# EAGLE board avoccado-avr-pcb-felina-100x100 (EAGLE 7.2.0), part 1 of 3
Avoccado PCB AVR
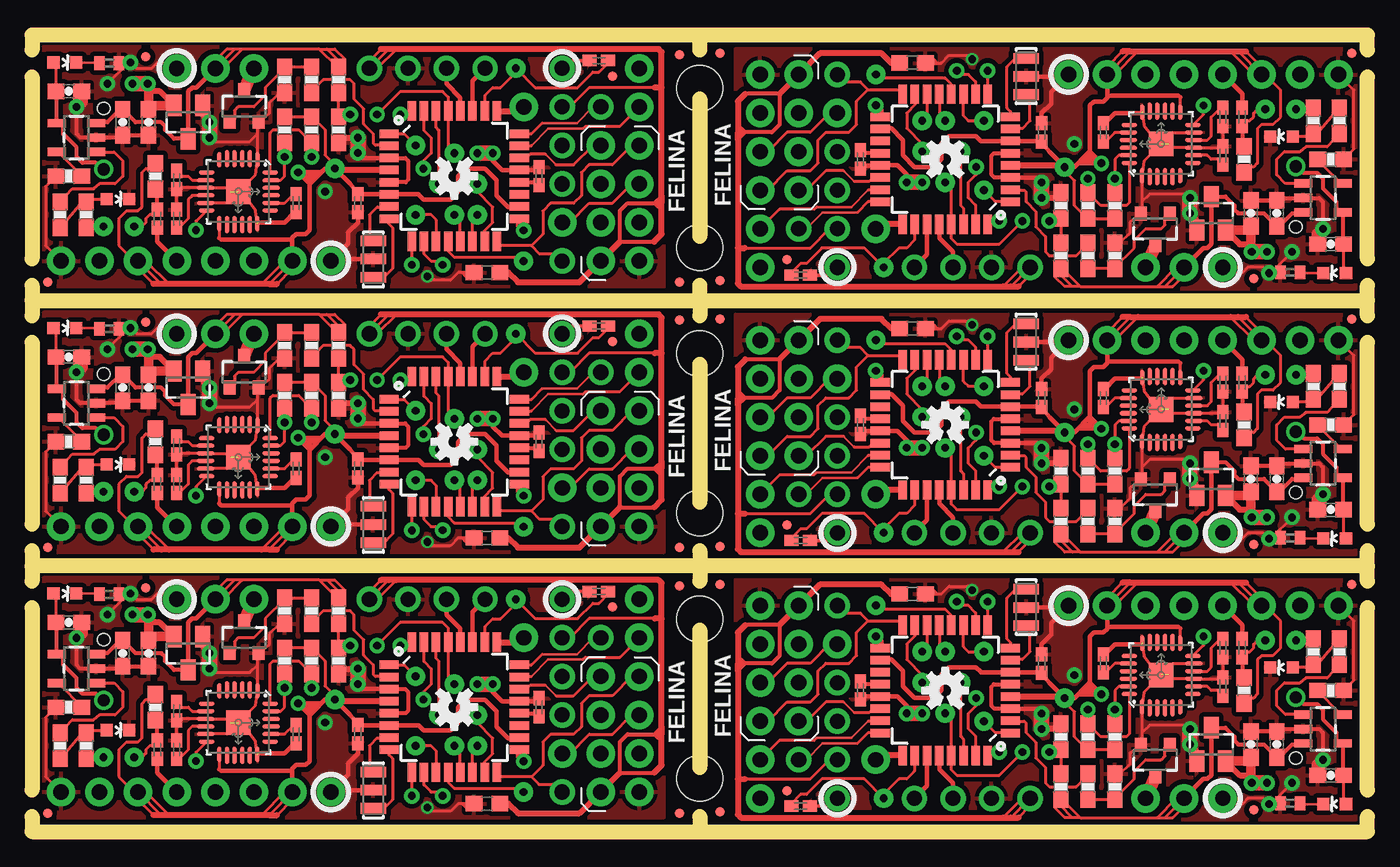
[diagram p0: board, top side]
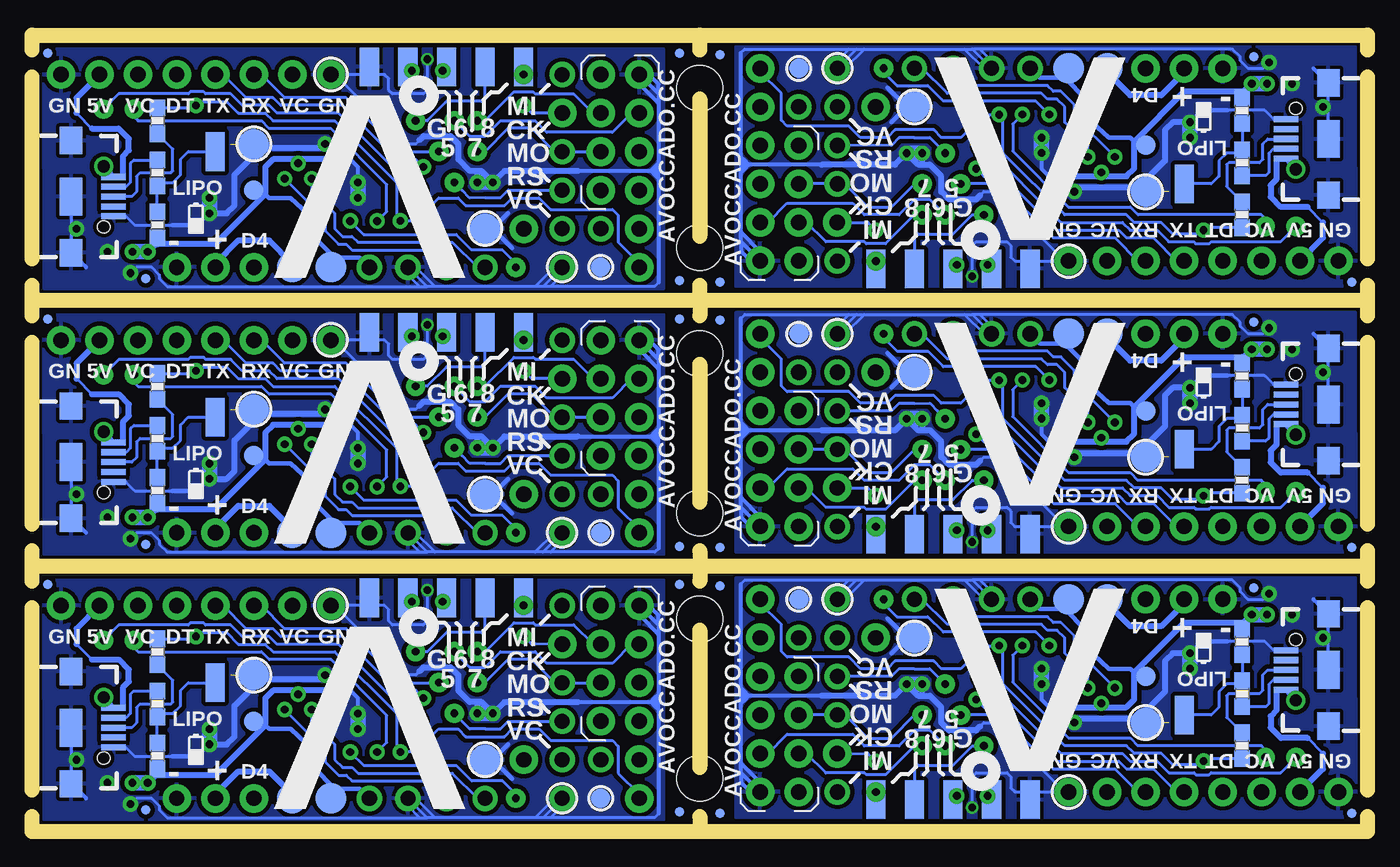
[diagram p1: board, bottom side, seen from below]

No outline drawn. Coordinates in mm, seen from the top.
Copper layers (1*16): Top 0.035mm / dielectric 1.5mm / Bottom 0.035mm
Design rules "SeeedStudio_2layer_DRU_no_angle_20140221 *": minimum track width 6mil, minimum drill 12mil, track to track 6mil, track to pad 6mil, pad to pad 6mil, via to via 6mil, smd to smd 0mil, copper to edge 10mil, drill to drill 10mil, minimum pad ring 10mil, minimum via ring 6mil, stop-mask expansion 0mil, vias tented up to drill 100mil, thermal gap 10mil
Net classes: 1 vcc: width 0.203 mm; 3 usbvcc: width 0.203 mm, drill 0.61 mm, clearance 0.152 mm
Holes 3 mm at 43.5,31 43.5,20.5 43.5,20.5 43.5,31 43.5,38 43.5,48.5 43.5,48.5 43.5,38 43.5,13.5 43.5,3 43.5,3 43.5,13.5
tRestrict: area 23.3,21.1 to 31.4,29.3; area 11.1,22.1 to 15.1,26.2; area 15.1,22.1 to 17.2,24.7; area 55.6,22.2 to 63.7,30.4; area 71.9,25.3 to 75.9,29.4; area 69.8,26.8 to 71.9,29.4; area 55.6,39.7 to 63.7,47.9; area 71.9,42.8 to 75.9,46.9; area 69.8,44.3 to 71.9,46.9; area 23.3,38.6 to 31.4,46.8; area 11.1,39.6 to 15.1,43.7; area 15.1,39.6 to 17.2,42.2; 6 more areas
Milling: 38 lines

## Footprints (pad centres in the part's own frame; a part is rotated, then mirrored left to right if it is on the bottom)
C0402K = smd 0.925 x 0.74: 1 -0.6,0; 2 0.6,0
0603-CAP = smd 1.1 x 1: 1 -0.85,0; 2 0.85,0
C0603 = smd 1.1 x 1: 1 -0.85,0; 2 0.85,0
LED-0603 = smd 0.8 x 0.8: A 0,-0.75; C 0,0.75
MICRO-FIDUCIAL = smd 0.635 x 0.635: 1 0,0
1X01NS-KIT = drill 1 pad 1.676: 1 0,0
1X02_NO_SILK = drill 1.016 pad 1.88: 1 0,0; 2 2.54,0
1X01 = drill 1.016 pad 1.88: 1 0,0
USB-B-MICRO-SMD_V03 = smd 1.6 x 0.4: D+1 2.8,0; D-1 2.8,0.65; GND1 2.8,-1.3; ID1 2.8,-0.65; VBUS1 2.8,1.3 | smd 1.5 x 1.8: SHIELD1 0,3.7; SHIELD2 0,-3.7 | smd 1.5 x 2.5: SHIELD3 0,0 | hole 0.8: 2.15,-2
SOT23 = smd 1 x 1.4: 1 -0.95,-1.1; 2 0.95,-1.1; 3 0,1.1
TQFP32-08 = smd 1.27 x 0.559: 1 -4.293,2.8; 2 -4.293,2; 3 -4.293,1.2; 4 -4.293,0.4; 5 -4.293,-0.4; 6 -4.293,-1.2; 7 -4.293,-2; 8 -4.293,-2.8; 17 4.293,-2.8; 18 4.293,-2; 19 4.293,-1.2; 20 4.293,-0.4; 21 4.293,0.4; 22 4.293,1.2; 23 4.293,2; 24 4.293,2.8 | smd 0.559 x 1.27: 9 -2.8,-4.293; 10 -2,-4.293; 11 -1.2,-4.293; 12 -0.4,-4.293; 13 0.4,-4.293; 14 1.2,-4.293; 15 2,-4.293; 16 2.8,-4.293; 25 2.8,4.293; 26 2,4.293; 27 1.2,4.293; 28 0.4,4.293; 29 -0.4,4.293; 30 -1.2,4.293; 31 -2,4.293; 32 -2.8,4.293
RESONATOR-SMD = smd 0.7 x 1.7: 1 -1.2,0; 2 0,0; 3 1.2,0
SOT23-3 = smd 0.8 x 0.9: 1 -0.95,-1; 2 0.95,-1; 3 0,1.1
0603-RES = smd 1.1 x 1: 1 -0.85,0; 2 0.85,0
R0402 = smd 0.7 x 0.9: 1 -0.65,0; 2 0.65,0
PAD.02X.02 = smd 2.54 x 1.27: P$1 0,0
PAD.03X.05 = smd 1.27 x 1.27: P$1 0,0
TP20R = smd 2 x 2: TP 0,0
QFN-24-TESTING = smd 1.016 x 0.254: 1 -2.1,1.257; 6 -2.1,-1.25; 13 2.1,-1.25; 18 2.1,1.25 | smd 1.143 x 0.254: 2 -2.163,0.75; 3 -2.163,0.25; 4 -2.163,-0.25; 5 -2.163,-0.75; 14 2.163,-0.75; 15 2.163,-0.25; 16 2.163,0.25; 17 2.163,0.75 | smd 0.254 x 1.016: 7 -1.25,-2.1; 12 1.25,-2.1; 19 1.25,2.1; 24 -1.25,2.1 | smd 0.254 x 1.143: 8 -0.75,-2.163; 9 -0.25,-2.163; 10 0.25,-2.163; 11 0.75,-2.163; 20 0.75,2.163; 21 0.25,2.163; 22 -0.25,2.163; 23 -0.75,2.163 | smd 1.626 x 1.626: P$1 0,0
SOT23-5 = smd 0.55 x 1.2: 1 -0.95,-1.3; 2 0,-1.3; 3 0.95,-1.3; 4 0.95,1.3; 5 -0.95,1.3

## Placement (x,y rotation side)
C1  0.1uF  [C0402K]  32.91,7.7 270 top
C2  0.1uF  [C0402K]  7.76,4.9 270 top
C3  0.1uF  [C0402K]  20.97,5.93 90 top
C4  4.7uF  [0603-CAP]  1.92,13.28 0 top
C5  4.7uF  [0603-CAP]  5.48,11.25 270 top
C6  4.7uF  [0603-CAP]  7.18,11.25 270 top
C7  0.1uF  [C0402K]  36.85,15.32 180 top
C8  0.1uF  [C0402K]  9.04,4.9 90 top
C9  2.2nF  [C0402K]  16.91,5.92 270 top
C10  0.1uF  [C0603]  29.48,1.35 180 top
C11  0.1uF  [C0402K]  9.04,7.44 270 top
C12  0.1uF  [C0603]  29.48,18.85 180 top
C13  0.1uF  [C0402K]  20.97,23.43 90 top
C14  0.1uF  [C0402K]  32.91,25.2 270 top
C15  4.7uF  [0603-CAP]  1.92,30.78 0 top
C16  0.1uF  [C0402K]  7.76,22.4 270 top
C17  4.7uF  [0603-CAP]  5.48,28.75 270 top
C18  4.7uF  [0603-CAP]  7.18,28.75 270 top
C19  0.1uF  [C0402K]  36.85,32.82 180 top
C20  0.1uF  [C0402K]  9.04,22.4 90 top
C21  2.2nF  [C0402K]  16.91,23.42 270 top
C22  0.1uF  [C0402K]  9.04,24.94 270 top
C23  0.1uF  [C0603]  57.52,32.65 0 top
C24  0.1uF  [C0402K]  66.03,28.07 270 top
C25  0.1uF  [C0402K]  54.09,26.3 90 top
C26  4.7uF  [0603-CAP]  85.08,20.72 180 top
C27  0.1uF  [C0402K]  79.23,29.1 90 top
C28  4.7uF  [0603-CAP]  81.52,22.75 90 top
C29  4.7uF  [0603-CAP]  79.82,22.75 90 top
C30  0.1uF  [C0402K]  50.15,18.68 0 top
C31  0.1uF  [C0402K]  77.97,29.1 270 top
C32  2.2nF  [C0402K]  70.09,28.08 90 top
C33  0.1uF  [C0402K]  77.97,26.56 90 top
C34  0.1uF  [C0603]  57.52,50.15 0 top
C35  0.1uF  [C0402K]  66.03,45.57 270 top
C36  0.1uF  [C0402K]  54.09,43.8 90 top
C37  4.7uF  [0603-CAP]  85.08,38.22 180 top
C38  0.1uF  [C0402K]  79.23,46.6 90 top
C39  4.7uF  [0603-CAP]  81.52,40.25 90 top
C40  4.7uF  [0603-CAP]  79.82,40.25 90 top
C41  0.1uF  [C0402K]  50.15,36.18 0 top
C42  0.1uF  [C0402K]  77.97,46.6 270 top
C43  2.2nF  [C0402K]  70.09,45.58 90 top
C44  0.1uF  [C0402K]  77.97,44.06 90 top
C45  0.1uF  [C0603]  29.48,36.35 180 top
C46  0.1uF  [C0402K]  20.97,40.93 90 top
C47  0.1uF  [C0402K]  32.91,42.7 270 top
C48  4.7uF  [0603-CAP]  1.92,48.28 0 top
C49  0.1uF  [C0402K]  7.76,39.9 270 top
C50  4.7uF  [0603-CAP]  5.48,46.25 270 top
C51  4.7uF  [0603-CAP]  7.18,46.25 270 top
C52  0.1uF  [C0402K]  36.85,50.32 180 top
C53  0.1uF  [C0402K]  9.04,39.9 90 top
C54  2.2nF  [C0402K]  16.91,40.92 270 top
C55  0.1uF  [C0402K]  9.04,42.44 270 top
C56  0.1uF  [C0603]  57.52,15.15 0 top
C57  0.1uF  [C0402K]  66.03,10.57 270 top
C58  0.1uF  [C0402K]  54.09,8.8 90 top
C59  4.7uF  [0603-CAP]  85.08,3.22 180 top
C60  0.1uF  [C0402K]  79.23,11.6 90 top
C61  4.7uF  [0603-CAP]  81.52,5.25 90 top
C62  4.7uF  [0603-CAP]  79.82,5.25 90 top
C63  0.1uF  [C0402K]  50.15,1.18 0 top
C64  0.1uF  [C0402K]  77.97,11.6 270 top
C65  2.2nF  [C0402K]  70.09,10.58 90 top
C66  0.1uF  [C0402K]  77.97,9.06 90 top
D1  LED  [LED-0603]  5.16,6.19 270 top
D2  LED  [LED-0603]  1.67,15.19 270 top
D3  LED  [LED-0603]  5.16,23.69 270 top
D4  LED  [LED-0603]  1.67,32.69 270 top
D5  LED  [LED-0603]  81.84,27.81 90 top
D6  LED  [LED-0603]  85.33,18.81 90 top
D7  LED  [LED-0603]  81.84,45.31 90 top
D8  LED  [LED-0603]  85.33,36.31 90 top
D9  LED  [LED-0603]  5.16,41.19 270 top
D10  LED  [LED-0603]  1.67,50.19 270 top
D11  LED  [LED-0603]  81.84,10.31 90 top
D12  LED  [LED-0603]  85.33,1.31 90 top
FID1  FIDUCIALUFIDUCIAL  [MICRO-FIDUCIAL]  42.18,0.71 180 top
FID2  FIDUCIALUFIDUCIAL  [MICRO-FIDUCIAL]  0.53,0.71 180 top
FID3  FIDUCIALUFIDUCIAL  [MICRO-FIDUCIAL]  37.74,14.3 180 top
FID4  FIDUCIALUFIDUCIAL  [MICRO-FIDUCIAL]  42.18,15.7 180 top
FID5  FIDUCIALUFIDUCIAL  [MICRO-FIDUCIAL]  7,15.57 180 top
FID6  FIDUCIALUFIDUCIAL  [MICRO-FIDUCIAL]  42.18,15.7 180 bottom
FID7  FIDUCIALUFIDUCIAL  [MICRO-FIDUCIAL]  42.18,0.71 180 bottom
FID8  FIDUCIALUFIDUCIAL  [MICRO-FIDUCIAL]  0.53,0.71 180 bottom
FID9  FIDUCIALUFIDUCIAL  [MICRO-FIDUCIAL]  7,15.57 180 bottom
FID10  FIDUCIALUFIDUCIAL  [MICRO-FIDUCIAL]  0.53,18.21 180 top
FID11  FIDUCIALUFIDUCIAL  [MICRO-FIDUCIAL]  42.18,18.21 180 top
FID12  FIDUCIALUFIDUCIAL  [MICRO-FIDUCIAL]  37.74,31.8 180 top
FID13  FIDUCIALUFIDUCIAL  [MICRO-FIDUCIAL]  42.18,33.2 180 top
FID14  FIDUCIALUFIDUCIAL  [MICRO-FIDUCIAL]  7,33.07 180 top
FID15  FIDUCIALUFIDUCIAL  [MICRO-FIDUCIAL]  42.18,33.2 180 bottom
FID16  FIDUCIALUFIDUCIAL  [MICRO-FIDUCIAL]  42.18,18.21 180 bottom
FID17  FIDUCIALUFIDUCIAL  [MICRO-FIDUCIAL]  0.53,18.21 180 bottom
FID18  FIDUCIALUFIDUCIAL  [MICRO-FIDUCIAL]  7,33.07 180 bottom
FID19  FIDUCIALUFIDUCIAL  [MICRO-FIDUCIAL]  86.47,33.29 0 top
FID20  FIDUCIALUFIDUCIAL  [MICRO-FIDUCIAL]  44.82,33.29 0 top
FID21  FIDUCIALUFIDUCIAL  [MICRO-FIDUCIAL]  49.26,19.7 0 top
FID22  FIDUCIALUFIDUCIAL  [MICRO-FIDUCIAL]  44.82,18.3 0 top
FID23  FIDUCIALUFIDUCIAL  [MICRO-FIDUCIAL]  80,18.43 0 top
FID24  FIDUCIALUFIDUCIAL  [MICRO-FIDUCIAL]  44.82,18.3 0 bottom
FID25  FIDUCIALUFIDUCIAL  [MICRO-FIDUCIAL]  44.82,33.29 0 bottom
FID26  FIDUCIALUFIDUCIAL  [MICRO-FIDUCIAL]  86.47,33.29 0 bottom
FID27  FIDUCIALUFIDUCIAL  [MICRO-FIDUCIAL]  80,18.43 0 bottom
FID28  FIDUCIALUFIDUCIAL  [MICRO-FIDUCIAL]  86.47,50.79 0 top
FID29  FIDUCIALUFIDUCIAL  [MICRO-FIDUCIAL]  44.82,50.79 0 top
FID30  FIDUCIALUFIDUCIAL  [MICRO-FIDUCIAL]  49.26,37.2 0 top
FID31  FIDUCIALUFIDUCIAL  [MICRO-FIDUCIAL]  44.82,35.8 0 top
FID32  FIDUCIALUFIDUCIAL  [MICRO-FIDUCIAL]  80,35.93 0 top
FID33  FIDUCIALUFIDUCIAL  [MICRO-FIDUCIAL]  44.82,35.8 0 bottom
FID34  FIDUCIALUFIDUCIAL  [MICRO-FIDUCIAL]  44.82,50.79 0 bottom
FID35  FIDUCIALUFIDUCIAL  [MICRO-FIDUCIAL]  86.47,50.79 0 bottom
FID36  FIDUCIALUFIDUCIAL  [MICRO-FIDUCIAL]  80,35.93 0 bottom
FID37  FIDUCIALUFIDUCIAL  [MICRO-FIDUCIAL]  0.53,35.71 180 top
FID38  FIDUCIALUFIDUCIAL  [MICRO-FIDUCIAL]  42.18,35.71 180 top
FID39  FIDUCIALUFIDUCIAL  [MICRO-FIDUCIAL]  37.74,49.3 180 top
FID40  FIDUCIALUFIDUCIAL  [MICRO-FIDUCIAL]  42.18,50.7 180 top
FID41  FIDUCIALUFIDUCIAL  [MICRO-FIDUCIAL]  7,50.57 180 top
FID42  FIDUCIALUFIDUCIAL  [MICRO-FIDUCIAL]  42.18,50.7 180 bottom
FID43  FIDUCIALUFIDUCIAL  [MICRO-FIDUCIAL]  42.18,35.71 180 bottom
FID44  FIDUCIALUFIDUCIAL  [MICRO-FIDUCIAL]  0.53,35.71 180 bottom
FID45  FIDUCIALUFIDUCIAL  [MICRO-FIDUCIAL]  7,50.57 180 bottom
FID46  FIDUCIALUFIDUCIAL  [MICRO-FIDUCIAL]  86.47,15.79 0 top
FID47  FIDUCIALUFIDUCIAL  [MICRO-FIDUCIAL]  44.82,15.79 0 top
FID48  FIDUCIALUFIDUCIAL  [MICRO-FIDUCIAL]  49.26,2.2 0 top
FID49  FIDUCIALUFIDUCIAL  [MICRO-FIDUCIAL]  44.82,0.8 0 top
FID50  FIDUCIALUFIDUCIAL  [MICRO-FIDUCIAL]  80,0.93 0 top
FID51  FIDUCIALUFIDUCIAL  [MICRO-FIDUCIAL]  44.82,0.8 0 bottom
FID52  FIDUCIALUFIDUCIAL  [MICRO-FIDUCIAL]  44.82,15.79 0 bottom
FID53  FIDUCIALUFIDUCIAL  [MICRO-FIDUCIAL]  86.47,15.79 0 bottom
FID54  FIDUCIALUFIDUCIAL  [MICRO-FIDUCIAL]  80,0.93 0 bottom
JP1  M01NOSILK-KIT  [1X01NS-KIT]  21.73,14.81 180 top
JP2  M021X02_NO_SILK  [1X02_NO_SILK]  39.52,2.11 180 top
JP3  M01PTH  [1X01]  19.2,2.11 270 top
JP4  M01NOSILK-KIT  [1X01NS-KIT]  34.44,12.27 180 top
JP5  M01NOSILK-KIT  [1X01NS-KIT]  34.44,14.81 180 top
JP6  M01PTH  [1X01]  1.42,2.11 180 top
JP7  M01PTH  [1X01]  1.42,19.61 180 top
JP8  M01PTH  [1X01]  14.12,2.11 270 top
JP9  M01PTH  [1X01]  11.57,2.11 270 top
JP10  M01PTH  [1X01]  9.04,2.11 270 top
JP11  M01PTH  [1X01]  16.66,2.11 270 top
JP12  M01NOSILK-KIT  [1X01NS-KIT]  34.44,2.11 180 top
JP13  M01PTH  [1X01]  34.44,4.65 180 top
JP14  M01NOSILK-KIT  [1X01NS-KIT]  34.44,7.19 180 top
JP15  M01NOSILK-KIT  [1X01NS-KIT]  34.44,9.73 180 top
JP16  M01NOSILK-KIT  [1X01NS-KIT]  24.27,14.81 180 top
JP17  M01PTH  [1X01]  3.96,2.11 270 top
JP18  M01PTH  [1X01]  6.5,2.11 270 top
JP19  M01PTH  [1X01]  39.52,12.27 270 top
JP20  M01NOSILK-KIT  [1X01NS-KIT]  36.98,12.27 270 top
JP21  M01PTH  [1X01]  31.89,12.27 270 top
JP22  USB_MICROB_PLUGCONN-11752  [USB-B-MICRO-SMD_V03]  2.07,10.15 180 bottom
JP23  M01PTH  [1X01]  14.12,14.81 180 top
JP24  M01PTH  [1X01]  11.57,14.81 180 top
JP25  M01PTH  [1X01]  9.04,14.81 180 top
JP26  M01PTH  [1X01]  14.12,19.61 270 top
JP27  M021X02_NO_SILK  [1X02_NO_SILK]  39.52,4.65 180 top
JP28  M021X02_NO_SILK  [1X02_NO_SILK]  39.52,7.19 180 top
JP29  M021X02_NO_SILK  [1X02_NO_SILK]  39.52,9.73 180 top
JP30  M01NOSILK-KIT  [1X01NS-KIT]  26.82,14.81 180 top
JP31  M01NOSILK-KIT  [1X01NS-KIT]  29.36,14.81 180 top
JP32  M01PTH  [1X01]  11.57,19.61 270 top
JP33  M01PTH  [1X01]  9.04,19.61 270 top
JP34  M01PTH  [1X01]  16.66,19.61 270 top
JP35  M01NOSILK-KIT  [1X01NS-KIT]  34.44,19.61 180 top
JP36  M01PTH  [1X01]  34.44,22.15 180 top
JP37  M01NOSILK-KIT  [1X01NS-KIT]  34.44,24.69 180 top
JP38  M01NOSILK-KIT  [1X01NS-KIT]  34.44,27.23 180 top
JP39  M01PTH  [1X01]  19.2,19.61 270 top
JP40  M01PTH  [1X01]  3.96,19.61 270 top
JP41  M01PTH  [1X01]  6.5,19.61 270 top
JP42  M01PTH  [1X01]  39.52,29.77 270 top
JP43  M01NOSILK-KIT  [1X01NS-KIT]  36.98,29.77 270 top
JP44  M01PTH  [1X01]  31.89,29.77 270 top
JP45  M01PTH  [1X01]  11.57,32.31 180 top
JP46  M01PTH  [1X01]  14.12,32.31 180 top
JP47  M01PTH  [1X01]  9.04,32.31 180 top
JP48  M021X02_NO_SILK  [1X02_NO_SILK]  39.52,19.61 180 top
JP49  M021X02_NO_SILK  [1X02_NO_SILK]  39.52,22.15 180 top
JP50  M021X02_NO_SILK  [1X02_NO_SILK]  39.52,24.69 180 top
JP51  M021X02_NO_SILK  [1X02_NO_SILK]  39.52,27.23 180 top
JP52  M01NOSILK-KIT  [1X01NS-KIT]  21.73,32.31 180 top
JP53  M01NOSILK-KIT  [1X01NS-KIT]  24.27,32.31 180 top
JP54  M01NOSILK-KIT  [1X01NS-KIT]  26.82,32.31 180 top
JP55  M01NOSILK-KIT  [1X01NS-KIT]  29.36,32.31 180 top
JP56  M01NOSILK-KIT  [1X01NS-KIT]  34.44,29.77 180 top
JP57  M01NOSILK-KIT  [1X01NS-KIT]  34.44,32.31 180 top
JP58  USB_MICROB_PLUGCONN-11752  [USB-B-MICRO-SMD_V03]  2.07,27.65 180 bottom
JP59  M01PTH  [1X01]  85.58,31.89 0 top
JP60  M01PTH  [1X01]  72.89,31.89 90 top
JP61  M01PTH  [1X01]  75.42,31.89 90 top
JP62  M01PTH  [1X01]  77.97,31.89 90 top
JP63  M01PTH  [1X01]  70.34,31.89 90 top
JP64  M01NOSILK-KIT  [1X01NS-KIT]  52.56,31.89 0 top
JP65  M01PTH  [1X01]  52.56,29.35 0 top
JP66  M01NOSILK-KIT  [1X01NS-KIT]  52.56,26.81 0 top
JP67  M01NOSILK-KIT  [1X01NS-KIT]  52.56,24.27 0 top
JP68  M01PTH  [1X01]  67.81,31.89 90 top
JP69  M01PTH  [1X01]  83.05,31.89 90 top
JP70  M01PTH  [1X01]  80.5,31.89 90 top
JP71  M01PTH  [1X01]  47.48,21.73 90 top
JP72  M01NOSILK-KIT  [1X01NS-KIT]  50.02,21.73 90 top
JP73  M01PTH  [1X01]  55.1,21.73 90 top
JP74  M01PTH  [1X01]  75.42,19.19 0 top
JP75  M01PTH  [1X01]  72.89,19.19 0 top
JP76  M01PTH  [1X01]  77.97,19.19 0 top
JP77  M021X02_NO_SILK  [1X02_NO_SILK]  47.48,31.89 0 top
JP78  M021X02_NO_SILK  [1X02_NO_SILK]  47.48,29.35 0 top
JP79  M021X02_NO_SILK  [1X02_NO_SILK]  47.48,26.81 0 top
JP80  M021X02_NO_SILK  [1X02_NO_SILK]  47.48,24.27 0 top
JP81  M01NOSILK-KIT  [1X01NS-KIT]  65.27,19.19 0 top
JP82  M01NOSILK-KIT  [1X01NS-KIT]  62.73,19.19 0 top
JP83  M01NOSILK-KIT  [1X01NS-KIT]  60.19,19.19 0 top
JP84  M01NOSILK-KIT  [1X01NS-KIT]  57.65,19.19 0 top
JP85  M01NOSILK-KIT  [1X01NS-KIT]  52.56,21.73 0 top
JP86  M01NOSILK-KIT  [1X01NS-KIT]  52.56,19.19 0 top
JP87  USB_MICROB_PLUGCONN-11752  [USB-B-MICRO-SMD_V03]  84.93,23.85 0 bottom
JP88  M01PTH  [1X01]  85.58,49.39 0 top
JP89  M01PTH  [1X01]  72.89,49.39 90 top
JP90  M01PTH  [1X01]  75.42,49.39 90 top
JP91  M01PTH  [1X01]  77.97,49.39 90 top
JP92  M01PTH  [1X01]  70.34,49.39 90 top
JP93  M01NOSILK-KIT  [1X01NS-KIT]  52.56,49.39 0 top
JP94  M01PTH  [1X01]  52.56,46.85 0 top
JP95  M01NOSILK-KIT  [1X01NS-KIT]  52.56,44.31 0 top
JP96  M01NOSILK-KIT  [1X01NS-KIT]  52.56,41.77 0 top
JP97  M01PTH  [1X01]  67.81,49.39 90 top
JP98  M01PTH  [1X01]  83.05,49.39 90 top
JP99  M01PTH  [1X01]  80.5,49.39 90 top
JP100  M01PTH  [1X01]  47.48,39.23 90 top
JP101  M01NOSILK-KIT  [1X01NS-KIT]  50.02,39.23 90 top
JP102  M01PTH  [1X01]  55.1,39.23 90 top
JP103  M01PTH  [1X01]  75.42,36.69 0 top
JP104  M01PTH  [1X01]  72.89,36.69 0 top
JP105  M01PTH  [1X01]  77.97,36.69 0 top
JP106  M021X02_NO_SILK  [1X02_NO_SILK]  47.48,49.39 0 top
JP107  M021X02_NO_SILK  [1X02_NO_SILK]  47.48,46.85 0 top
JP108  M021X02_NO_SILK  [1X02_NO_SILK]  47.48,44.31 0 top
JP109  M021X02_NO_SILK  [1X02_NO_SILK]  47.48,41.77 0 top
JP110  M01NOSILK-KIT  [1X01NS-KIT]  65.27,36.69 0 top
JP111  M01NOSILK-KIT  [1X01NS-KIT]  62.73,36.69 0 top
JP112  M01NOSILK-KIT  [1X01NS-KIT]  60.19,36.69 0 top
JP113  M01NOSILK-KIT  [1X01NS-KIT]  57.65,36.69 0 top
JP114  M01NOSILK-KIT  [1X01NS-KIT]  52.56,39.23 0 top
JP115  M01NOSILK-KIT  [1X01NS-KIT]  52.56,36.69 0 top
JP116  USB_MICROB_PLUGCONN-11752  [USB-B-MICRO-SMD_V03]  84.93,41.35 0 bottom
JP117  M01PTH  [1X01]  1.42,37.11 180 top
JP118  M01PTH  [1X01]  14.12,37.11 270 top
JP119  M01PTH  [1X01]  11.57,37.11 270 top
JP120  M01PTH  [1X01]  9.04,37.11 270 top
JP121  M01PTH  [1X01]  16.66,37.11 270 top
JP122  M01NOSILK-KIT  [1X01NS-KIT]  34.44,37.11 180 top
JP123  M01PTH  [1X01]  34.44,39.65 180 top
JP124  M01NOSILK-KIT  [1X01NS-KIT]  34.44,42.19 180 top
JP125  M01NOSILK-KIT  [1X01NS-KIT]  34.44,44.73 180 top
JP126  M01PTH  [1X01]  19.2,37.11 270 top
JP127  M01PTH  [1X01]  3.96,37.11 270 top
JP128  M01PTH  [1X01]  6.5,37.11 270 top
JP129  M01PTH  [1X01]  39.52,47.27 270 top
JP130  M01NOSILK-KIT  [1X01NS-KIT]  36.98,47.27 270 top
JP131  M01PTH  [1X01]  31.89,47.27 270 top
JP132  M01PTH  [1X01]  11.57,49.81 180 top
JP133  M01PTH  [1X01]  14.12,49.81 180 top
JP134  M01PTH  [1X01]  9.04,49.81 180 top
JP135  M021X02_NO_SILK  [1X02_NO_SILK]  39.52,37.11 180 top
JP136  M021X02_NO_SILK  [1X02_NO_SILK]  39.52,39.65 180 top
JP137  M021X02_NO_SILK  [1X02_NO_SILK]  39.52,42.19 180 top
JP138  M021X02_NO_SILK  [1X02_NO_SILK]  39.52,44.73 180 top
JP139  M01NOSILK-KIT  [1X01NS-KIT]  21.73,49.81 180 top
JP140  M01NOSILK-KIT  [1X01NS-KIT]  24.27,49.81 180 top
JP141  M01NOSILK-KIT  [1X01NS-KIT]  26.82,49.81 180 top
JP142  M01NOSILK-KIT  [1X01NS-KIT]  29.36,49.81 180 top
JP143  M01NOSILK-KIT  [1X01NS-KIT]  34.44,47.27 180 top
JP144  M01NOSILK-KIT  [1X01NS-KIT]  34.44,49.81 180 top
JP145  USB_MICROB_PLUGCONN-11752  [USB-B-MICRO-SMD_V03]  2.07,45.15 180 bottom
JP146  M01PTH  [1X01]  85.58,14.39 0 top
JP147  M01PTH  [1X01]  72.89,14.39 90 top
JP148  M01PTH  [1X01]  75.42,14.39 90 top
JP149  M01PTH  [1X01]  77.97,14.39 90 top
JP150  M01PTH  [1X01]  70.34,14.39 90 top
JP151  M01NOSILK-KIT  [1X01NS-KIT]  52.56,14.39 0 top
JP152  M01PTH  [1X01]  52.56,11.85 0 top
JP153  M01NOSILK-KIT  [1X01NS-KIT]  52.56,9.31 0 top
JP154  M01NOSILK-KIT  [1X01NS-KIT]  52.56,6.77 0 top
JP155  M01PTH  [1X01]  67.81,14.39 90 top
JP156  M01PTH  [1X01]  83.05,14.39 90 top
JP157  M01PTH  [1X01]  80.5,14.39 90 top
JP158  M01PTH  [1X01]  47.48,4.23 90 top
JP159  M01NOSILK-KIT  [1X01NS-KIT]  50.02,4.23 90 top
JP160  M01PTH  [1X01]  55.1,4.23 90 top
JP161  M01PTH  [1X01]  75.42,1.69 0 top
JP162  M01PTH  [1X01]  72.89,1.69 0 top
JP163  M01PTH  [1X01]  77.97,1.69 0 top
JP164  M021X02_NO_SILK  [1X02_NO_SILK]  47.48,14.39 0 top
JP165  M021X02_NO_SILK  [1X02_NO_SILK]  47.48,11.85 0 top
JP166  M021X02_NO_SILK  [1X02_NO_SILK]  47.48,9.31 0 top
JP167  M021X02_NO_SILK  [1X02_NO_SILK]  47.48,6.77 0 top
JP168  M01NOSILK-KIT  [1X01NS-KIT]  65.27,1.69 0 top
JP169  M01NOSILK-KIT  [1X01NS-KIT]  62.73,1.69 0 top
JP170  M01NOSILK-KIT  [1X01NS-KIT]  60.19,1.69 0 top
JP171  M01NOSILK-KIT  [1X01NS-KIT]  57.65,1.69 0 top
JP172  M01NOSILK-KIT  [1X01NS-KIT]  52.56,4.23 0 top
JP173  M01NOSILK-KIT  [1X01NS-KIT]  52.56,1.69 0 top
JP174  USB_MICROB_PLUGCONN-11752  [USB-B-MICRO-SMD_V03]  84.93,6.35 0 bottom
LDO  MCP1703CB  [SOT23]  9.8,11.25 180 top
LDO1  MCP1703CB  [SOT23]  9.8,28.75 180 top
LDO2  MCP1703CB  [SOT23]  77.2,22.75 0 top
LDO3  MCP1703CB  [SOT23]  77.2,40.25 0 top
LDO4  MCP1703CB  [SOT23]  9.8,46.25 180 top
LDO5  MCP1703CB  [SOT23]  77.2,5.25 0 top
LOGO1  OSHW-LOGOS  [OSHW-LOGO-S]  27.32,7.7 180 top
LOGO2  OSHW-LOGOS  [OSHW-LOGO-S]  27.32,25.2 180 top
LOGO3  OSHW-LOGOS  [OSHW-LOGO-S]  59.68,26.3 0 top
LOGO4  OSHW-LOGOS  [OSHW-LOGO-S]  59.68,43.8 0 top
LOGO5  OSHW-LOGOS  [OSHW-LOGO-S]  27.32,42.7 180 top
LOGO6  OSHW-LOGOS  [OSHW-LOGO-S]  59.68,8.8 0 top
MCU  ATMEGA328P_TQFP  [TQFP32-08]  27.32,7.7 0 top
MCU1  ATMEGA328P_TQFP  [TQFP32-08]  27.32,25.2 0 top
MCU2  ATMEGA328P_TQFP  [TQFP32-08]  59.68,26.3 180 top
MCU3  ATMEGA328P_TQFP  [TQFP32-08]  59.68,43.8 180 top
MCU4  ATMEGA328P_TQFP  [TQFP32-08]  27.32,42.7 0 top
MCU5  ATMEGA328P_TQFP  [TQFP32-08]  59.68,8.8 180 top
Q1  16MHz  [RESONATOR-SMD]  21.99,2.23 90 top
Q2  FET  [SOT23-3]  13.48,12.27 0 top
Q3  16MHz  [RESONATOR-SMD]  21.99,19.73 90 top
Q4  FET  [SOT23-3]  13.48,29.77 0 top
Q5  16MHz  [RESONATOR-SMD]  65.01,31.77 270 top
Q6  FET  [SOT23-3]  73.52,21.73 180 top
Q7  16MHz  [RESONATOR-SMD]  65.01,49.27 270 top
Q8  FET  [SOT23-3]  73.52,39.23 180 top
Q9  16MHz  [RESONATOR-SMD]  21.99,37.23 90 top
Q10  FET  [SOT23-3]  13.48,47.27 0 top
Q11  16MHz  [RESONATOR-SMD]  65.01,14.27 270 top
Q12  FET  [SOT23-3]  73.52,4.23 180 top
R1  511R  [0603-RES]  17.93,14.05 90 top
R2  10K  [0603-RES]  7.64,7.7 90 top
R3  2K  [0603-RES]  1.92,7.7 0 top
R4  2K  [0603-RES]  1.35,5.16 90 top
R5  4.7M  [0603-RES]  16.15,14.05 90 top
R6  511R  [0603-RES]  3.07,5.16 90 top
R7  4.7M  [0603-RES]  19.7,10.74 90 top
R8  4.7M  [0603-RES]  19.7,14.05 90 top
R9  2K  [R0402]  4.59,15.14 180 top
R10  10K  [0603-RES]  16.15,10.74 90 top
R11  10K  [0603-RES]  17.93,10.74 90 top
R12  10K  [0603-RES]  7.64,25.2 90 top
R13  68R  [0603-RES]  7.76,5.16 90 bottom
R14  68R  [0603-RES]  7.76,8.59 270 bottom
R15  2K  [0603-RES]  7.76,12.01 90 bottom
R16  511R  [0603-RES]  17.93,31.55 90 top
R17  2K  [0603-RES]  1.92,25.2 0 top
R18  2K  [0603-RES]  1.35,22.66 90 top
R19  4.7M  [0603-RES]  16.15,31.55 90 top
R20  511R  [0603-RES]  3.07,22.66 90 top
R21  4.7M  [0603-RES]  19.7,28.24 90 top
R22  4.7M  [0603-RES]  19.7,31.55 90 top
R23  10K  [0603-RES]  16.15,28.24 90 top
R24  10K  [0603-RES]  17.93,28.24 90 top
R25  68R  [0603-RES]  7.76,22.66 90 bottom
R26  68R  [0603-RES]  7.76,26.09 270 bottom
R27  2K  [0603-RES]  7.76,29.51 90 bottom
R28  2K  [R0402]  4.59,32.64 180 top
R29  10K  [0603-RES]  79.36,26.3 270 top
R30  511R  [0603-RES]  69.08,19.95 270 top
R31  2K  [0603-RES]  85.08,26.3 180 top
R32  2K  [0603-RES]  85.65,28.84 270 top
R33  4.7M  [0603-RES]  70.85,19.95 270 top
R34  511R  [0603-RES]  83.93,28.84 270 top
R35  4.7M  [0603-RES]  67.3,23.26 270 top
R36  4.7M  [0603-RES]  67.3,19.95 270 top
R37  10K  [0603-RES]  70.85,23.26 270 top
R38  10K  [0603-RES]  69.08,23.26 270 top
R39  68R  [0603-RES]  79.23,28.84 270 bottom
R40  68R  [0603-RES]  79.23,25.41 90 bottom
R41  2K  [0603-RES]  79.23,21.99 270 bottom
R42  2K  [R0402]  82.41,18.86 0 top
R43  10K  [0603-RES]  79.36,43.8 270 top
R44  511R  [0603-RES]  69.08,37.45 270 top
R45  2K  [0603-RES]  85.08,43.8 180 top
R46  2K  [0603-RES]  85.65,46.34 270 top
R47  4.7M  [0603-RES]  70.85,37.45 270 top
R48  511R  [0603-RES]  83.93,46.34 270 top
R49  4.7M  [0603-RES]  67.3,40.76 270 top
R50  4.7M  [0603-RES]  67.3,37.45 270 top
R51  10K  [0603-RES]  70.85,40.76 270 top
R52  10K  [0603-RES]  69.08,40.76 270 top
R53  68R  [0603-RES]  79.23,46.34 270 bottom
R54  68R  [0603-RES]  79.23,42.91 90 bottom
R55  2K  [0603-RES]  79.23,39.49 270 bottom
R56  2K  [R0402]  82.41,36.36 0 top
R57  10K  [0603-RES]  7.64,42.7 90 top
R58  511R  [0603-RES]  17.93,49.05 90 top
R59  2K  [0603-RES]  1.92,42.7 0 top
R60  2K  [0603-RES]  1.35,40.16 90 top
R61  4.7M  [0603-RES]  16.15,49.05 90 top
R62  511R  [0603-RES]  3.07,40.16 90 top
R63  4.7M  [0603-RES]  19.7,45.74 90 top
R64  4.7M  [0603-RES]  19.7,49.05 90 top
R65  10K  [0603-RES]  16.15,45.74 90 top
R66  10K  [0603-RES]  17.93,45.74 90 top
R67  68R  [0603-RES]  7.76,40.16 90 bottom
R68  68R  [0603-RES]  7.76,43.59 270 bottom
R69  2K  [0603-RES]  7.76,47.01 90 bottom
R70  2K  [R0402]  4.59,50.14 180 top
R71  10K  [0603-RES]  79.36,8.8 270 top
R72  511R  [0603-RES]  69.08,2.45 270 top
R73  2K  [0603-RES]  85.08,8.8 180 top
R74  2K  [0603-RES]  85.65,11.34 270 top
R75  4.7M  [0603-RES]  70.85,2.45 270 top
R76  511R  [0603-RES]  83.93,11.34 270 top
R77  4.7M  [0603-RES]  67.3,5.76 270 top
R78  4.7M  [0603-RES]  67.3,2.45 270 top
R79  10K  [0603-RES]  70.85,5.76 270 top
R80  10K  [0603-RES]  69.08,5.76 270 top
R81  68R  [0603-RES]  79.23,11.34 270 bottom
R82  68R  [0603-RES]  79.23,7.92 90 bottom
R83  2K  [0603-RES]  79.23,4.49 270 bottom
R84  2K  [R0402]  82.41,1.36 0 top
TP1  TEST-POINT2  [PAD.02X.02]  24.27,1.6 90 bottom
TP2  M01PTH  [1X01]  39.52,14.81 180 top
TP3  TEST-POINT3X5  [PAD.03X.05]  36.98,14.81 90 bottom
TP4  TPTP20R  [TP20R]  14.12,6.68 180 bottom
TP5  TEST-POINT3X5  [PAD.03X.05]  14.12,9.73 180 bottom
TP6  TEST-POINT2  [PAD.02X.02]  26.82,1.6 90 bottom
TP7  TEST-POINT2  [PAD.02X.02]  29.36,1.6 90 bottom
TP8  TEST-POINT2  [PAD.02X.02]  31.89,1.6 90 bottom
TP9  TEST-POINT2  [PAD.02X.02]  21.73,1.6 90 bottom
TP10  TPTP20R  [TP20R]  16.66,14.81 180 bottom
TP11  TEST-POINT2  [PAD.02X.02]  11.57,7.19 90 bottom
TP12  TPTP20R  [TP20R]  29.36,12.27 180 bottom
TP13  TPTP20R  [TP20R]  19.2,14.81 180 bottom
TP14  TEST-POINT2  [PAD.02X.02]  24.27,19.1 90 bottom
TP15  TEST-POINT2  [PAD.02X.02]  26.82,19.1 90 bottom
TP16  TEST-POINT2  [PAD.02X.02]  29.36,19.1 90 bottom
TP17  TEST-POINT2  [PAD.02X.02]  31.89,19.1 90 bottom
TP18  M01PTH  [1X01]  39.52,32.31 180 top
TP19  TEST-POINT3X5  [PAD.03X.05]  14.12,27.23 180 bottom
TP20  TEST-POINT3X5  [PAD.03X.05]  36.98,32.31 90 bottom
TP21  TEST-POINT2  [PAD.02X.02]  21.73,19.1 90 bottom
TP22  TPTP20R  [TP20R]  16.66,32.31 180 bottom
TP23  TEST-POINT2  [PAD.02X.02]  11.57,24.69 90 bottom
TP24  TPTP20R  [TP20R]  29.36,29.77 180 bottom
TP25  TPTP20R  [TP20R]  19.2,32.31 180 bottom
TP26  TPTP20R  [TP20R]  14.12,24.18 180 bottom
TP27  TEST-POINT2  [PAD.02X.02]  62.73,32.4 270 bottom
TP28  TEST-POINT2  [PAD.02X.02]  60.19,32.4 270 bottom
TP29  TEST-POINT2  [PAD.02X.02]  57.65,32.4 270 bottom
TP30  TEST-POINT2  [PAD.02X.02]  55.1,32.4 270 bottom
TP31  M01PTH  [1X01]  47.48,19.19 0 top
TP32  TEST-POINT3X5  [PAD.03X.05]  72.89,24.27 0 bottom
TP33  TEST-POINT3X5  [PAD.03X.05]  50.02,19.19 270 bottom
TP34  TEST-POINT2  [PAD.02X.02]  65.27,32.4 270 bottom
TP35  TPTP20R  [TP20R]  70.34,19.19 0 bottom
TP36  TEST-POINT2  [PAD.02X.02]  75.42,26.81 270 bottom
TP37  TPTP20R  [TP20R]  57.65,21.73 0 bottom
TP38  TPTP20R  [TP20R]  67.81,19.19 0 bottom
TP39  TPTP20R  [TP20R]  72.89,27.32 0 bottom
TP40  TEST-POINT2  [PAD.02X.02]  62.73,49.9 270 bottom
TP41  TEST-POINT2  [PAD.02X.02]  60.19,49.9 270 bottom
TP42  TEST-POINT2  [PAD.02X.02]  57.65,49.9 270 bottom
TP43  TEST-POINT2  [PAD.02X.02]  55.1,49.9 270 bottom
TP44  M01PTH  [1X01]  47.48,36.69 0 top
TP45  TEST-POINT3X5  [PAD.03X.05]  72.89,41.77 0 bottom
TP46  TEST-POINT3X5  [PAD.03X.05]  50.02,36.69 270 bottom
TP47  TEST-POINT2  [PAD.02X.02]  65.27,49.9 270 bottom
TP48  TPTP20R  [TP20R]  70.34,36.69 0 bottom
TP49  TEST-POINT2  [PAD.02X.02]  75.42,44.31 270 bottom
TP50  TPTP20R  [TP20R]  57.65,39.23 0 bottom
TP51  TPTP20R  [TP20R]  67.81,36.69 0 bottom
TP52  TPTP20R  [TP20R]  72.89,44.82 0 bottom
TP53  TEST-POINT2  [PAD.02X.02]  24.27,36.6 90 bottom
TP54  TEST-POINT2  [PAD.02X.02]  26.82,36.6 90 bottom
TP55  TEST-POINT2  [PAD.02X.02]  29.36,36.6 90 bottom
TP56  TEST-POINT2  [PAD.02X.02]  31.89,36.6 90 bottom
TP57  M01PTH  [1X01]  39.52,49.81 180 top
TP58  TEST-POINT3X5  [PAD.03X.05]  14.12,44.73 180 bottom
TP59  TEST-POINT3X5  [PAD.03X.05]  36.98,49.81 90 bottom
TP60  TEST-POINT2  [PAD.02X.02]  21.73,36.6 90 bottom
TP61  TPTP20R  [TP20R]  16.66,49.81 180 bottom
TP62  TEST-POINT2  [PAD.02X.02]  11.57,42.19 90 bottom
TP63  TPTP20R  [TP20R]  29.36,47.27 180 bottom
TP64  TPTP20R  [TP20R]  19.2,49.81 180 bottom
TP65  TPTP20R  [TP20R]  14.12,41.68 180 bottom
TP66  TEST-POINT2  [PAD.02X.02]  62.73,14.9 270 bottom
TP67  TEST-POINT2  [PAD.02X.02]  60.19,14.9 270 bottom
TP68  TEST-POINT2  [PAD.02X.02]  57.65,14.9 270 bottom
TP69  TEST-POINT2  [PAD.02X.02]  55.1,14.9 270 bottom
TP70  M01PTH  [1X01]  47.48,1.69 0 top
TP71  TEST-POINT3X5  [PAD.03X.05]  72.89,6.77 0 bottom
TP72  TEST-POINT3X5  [PAD.03X.05]  50.02,1.69 270 bottom
TP73  TEST-POINT2  [PAD.02X.02]  65.27,14.9 270 bottom
TP74  TPTP20R  [TP20R]  70.34,1.69 0 bottom
TP75  TEST-POINT2  [PAD.02X.02]  75.42,9.31 270 bottom
TP76  TPTP20R  [TP20R]  57.65,4.23 0 bottom
TP77  TPTP20R  [TP20R]  67.81,1.69 0 bottom
TP78  TPTP20R  [TP20R]  72.89,9.82 0 bottom
U1  MPU-6000QFN-24  [QFN-24-TESTING]  13.1,6.68 270 top
U2  MCP73831  [SOT23-5]  2.43,10.24 90 top
U3  MCP73831  [SOT23-5]  2.43,27.74 90 top
U4  MPU-6000QFN-24  [QFN-24-TESTING]  13.1,24.18 270 top
U5  MCP73831  [SOT23-5]  84.57,23.76 270 top
U6  MPU-6000QFN-24  [QFN-24-TESTING]  73.9,27.32 90 top
U7  MCP73831  [SOT23-5]  84.57,41.26 270 top
U8  MPU-6000QFN-24  [QFN-24-TESTING]  73.9,44.82 90 top
U9  MCP73831  [SOT23-5]  2.43,45.24 90 top
U10  MPU-6000QFN-24  [QFN-24-TESTING]  13.1,41.68 270 top
U11  MCP73831  [SOT23-5]  84.57,6.26 270 top
U12  MPU-6000QFN-24  [QFN-24-TESTING]  73.9,9.82 90 top

## Library data of the parts
C1 C3 C13 C14 C24 C25 C35 C36 C46 C47 C57 C58 = resistor
C2 C7-C12 C16 C19-C23 C27 C30-C34 C38 C41-C45 C49 C52-C56 C60 C63-C66 R9 R28 R42 R56 R70 R84 = rcl
C4-C6 C15 C17 C18 C26 C28 C29 C37 C39 C40 C48 C50 C51 C59 C61 C62 = SparkFun-Capacitors; PROD_ID: CAP-08280
D1-D12 Q1 Q3 Q5 Q7 Q9 Q11 U2 U3 U5 U7 U9 U11 = SparkFun
FID1-FID54 LOGO1-LOGO6 = SparkFun-Aesthetics
JP1-JP21 JP23-JP57 JP59-JP86 JP88-JP115 JP117-JP144 JP146-JP173 TP2 TP18 TP31 TP44 TP57 TP70 = SparkFun-Connectors
JP22 JP58 JP87 JP116 JP145 JP174 = SparkFun-Connectors; PROD_ID: CONN-11752
LDO LDO1-LDO5 = linear
MCU MCU1-MCU5 = SparkFun-DigitalIC; PROD_ID: IC-09069
Q2 Q4 Q6 Q8 Q10 Q12 = SparkFun-DiscreteSemi; PROD_ID: TRANS-08345
R1-R8 R10-R27 R29-R41 R43-R55 R57-R69 R71-R83 = SparkFun-Resistors
TP1 TP3 TP5-TP9 TP11 TP14-TP17 TP19-TP21 TP23 TP27-TP30 TP32-TP34 TP36 TP40-TP43 TP45-TP47 TP49 TP53-TP56 TP58-TP60 TP62 TP66-TP69 TP71-TP73 TP75 = SparkFun-Passives
TP4 TP10 TP12 TP13 TP22 TP24-TP26 TP35 TP37-TP39 TP48 TP50-TP52 TP61 TP63-TP65 TP74 TP76-TP78 = testpad
U1 U4 U6 U8 U10 U12 = SparkFun-Sensors

## Nets
3.3V1: C12.1 C13.2 C18.1 JP34.1 JP41.1 JP48.2 JP52.1 JP56.1 LDO1.2 MCU1.4 MCU1.6 MCU1.18 R12.2 R23.2 R24.2 R27.2 TP19.P$1 TP25.TP U4.13
3.3V2: C23.1 C24.2 C29.1 JP63.1 JP70.1 JP77.2 JP81.1 JP85.1 LDO2.2 MCU2.4 MCU2.6 MCU2.18 R29.2 R37.2 R38.2 R41.2 TP32.P$1 TP38.TP U6.13
3.3V3: C34.1 C35.2 C40.1 JP92.1 JP99.1 JP106.2 JP110.1 JP114.1 LDO3.2 MCU3.4 MCU3.6 MCU3.18 R43.2 R51.2 R52.2 R55.2 TP45.P$1 TP51.TP U8.13
3.3V4: C45.1 C46.2 C51.1 JP121.1 JP128.1 JP135.2 JP139.1 JP143.1 LDO4.2 MCU4.4 MCU4.6 MCU4.18 R57.2 R65.2 R66.2 R69.2 TP58.P$1 TP64.TP U10.13
3.3V5: C3.2 C6.1 C10.1 JP1.1 JP2.2 JP4.1 JP11.1 JP18.1 LDO.2 MCU.4 MCU.6 MCU.18 R2.2 R10.2 R11.2 R15.2 TP5.P$1 TP13.TP U1.13
3.3V6: C56.1 C57.2 C62.1 JP150.1 JP157.1 JP164.2 JP168.1 JP172.1 LDO5.2 MCU5.4 MCU5.6 MCU5.18 R71.2 R79.2 R80.2 R83.2 TP71.P$1 TP77.TP U12.13
5V1: C15.1 D4.A JP40.1 JP58.VBUS1 U3.4
5V2: C26.1 D6.A JP69.1 JP87.VBUS1 U5.4
5V3: C37.1 D8.A JP98.1 JP116.VBUS1 U7.4
5V4: C48.1 D10.A JP127.1 JP145.VBUS1 U9.4
5V5: C4.1 D2.A JP17.1 JP22.VBUS1 U2.4
5V6: C59.1 D12.A JP156.1 JP174.VBUS1 U11.4
7-TO-D-: R14.1 R15.1 TP11.P$1
7-TO-D-1: R26.1 R27.1 TP23.P$1
7-TO-D-2: R40.1 R41.1 TP36.P$1
7-TO-D-3: R54.1 R55.1 TP49.P$1
7-TO-D-4: R68.1 R69.1 TP62.P$1
7-TO-D-5: R82.1 R83.1 TP75.P$1
A6: JP30.1 MCU.28 R10.1 U1.23
A7: JP54.1 MCU1.28 R23.1 U4.23
A7-NRF-IRQ1: JP51.2 MCU1.22
A7-NRF-IRQ2: JP80.2 MCU2.22
A7-NRF-IRQ3: JP109.2 MCU3.22
A7-NRF-IRQ4: JP138.2 MCU4.22
A7-NRF-IRQ5: JP29.2 MCU.22
A7-NRF-IRQ6: JP167.2 MCU5.22
A8: JP55.1 MCU1.27 R24.1 U4.24
A9: C19.1 MCU1.26 R21.2 R22.1
A10: JP44.1 MCU1.25
A11: JP43.1 MCU1.24
A12: JP42.1 MCU1.23
A13: MCU1.19
A14: JP83.1 MCU2.28 R37.1 U6.23
A15: JP84.1 MCU2.27 R38.1 U6.24
A16: C30.1 MCU2.26 R35.2 R36.1
A17: JP73.1 MCU2.25
A18: JP72.1 MCU2.24
A19: JP71.1 MCU2.23
A20: MCU2.19
A21: JP112.1 MCU3.28 R51.1 U8.23
A22: JP113.1 MCU3.27 R52.1 U8.24
A23: C41.1 MCU3.26 R49.2 R50.1
A24: JP102.1 MCU3.25
A25: JP101.1 MCU3.24
A26: JP100.1 MCU3.23
A27: MCU3.19
A28: JP141.1 MCU4.28 R65.1 U10.23
A29: JP142.1 MCU4.27 R66.1 U10.24
A30: C52.1 MCU4.26 R63.2 R64.1
A31: JP131.1 MCU4.25
A32: JP130.1 MCU4.24
A33: JP129.1 MCU4.23
A34: MCU4.19
A35: JP31.1 MCU.27 R11.1 U1.24
A36: C7.1 MCU.26 R7.2 R8.1
A37: JP21.1 MCU.25
A38: JP20.1 MCU.24
A39: JP19.1 MCU.23
A40: MCU.19
A41: JP170.1 MCU5.28 R79.1 U12.23
A42: JP171.1 MCU5.27 R80.1 U12.24
A43: C63.1 MCU5.26 R77.2 R78.1
A44: JP160.1 MCU5.25
A45: JP159.1 MCU5.24
A46: JP158.1 MCU5.23
A47: MCU5.19
AREF1: C14.2 MCU1.20
AREF2: C25.2 MCU2.20
AREF3: C36.2 MCU3.20
AREF4: C47.2 MCU4.20
AREF5: C1.2 MCU.20
AREF6: C58.2 MCU5.20
CHG-PROG1: R17.2 U3.5
CHG-PROG2: R31.2 U5.5
CHG-PROG3: R45.2 U7.5
CHG-PROG4: R59.2 U9.5
CHG-PROG5: R3.2 U2.5
CHG-PROG6: R73.2 U11.5
D1: JP49.1 MCU1.13
D2: MCU1.12 TP17.P$1
D2-INT1: MCU1.32 R25.1 TP18.1 U4.12
D2-INT2: MCU2.32 R39.1 TP31.1 U6.12
D2-INT3: MCU3.32 R53.1 TP44.1 U8.12
D2-INT4: MCU4.32 R67.1 TP57.1 U10.12
D2-INT5: MCU.32 R13.1 TP2.1 U1.12
D2-INT6: MCU5.32 R81.1 TP70.1 U12.12
D3: JP27.1 MCU.13
D8: MCU.12 TP8.P$1
D11: MCU1.1 R20.1
D12: MCU1.2 R16.1
D13: MCU1.9 TP14.P$1
D14: MCU1.10 TP15.P$1
D15: MCU1.11 TP16.P$1
D16: JP49.2 MCU1.14
D17: JP78.1 MCU2.13
D18: MCU2.12 TP30.P$1
D19: MCU2.1 R34.1
D20: MCU2.2 R30.1
D21: MCU2.9 TP27.P$1
D22: MCU2.10 TP28.P$1
D23: MCU2.11 TP29.P$1
D24: JP78.2 MCU2.14
D25: JP107.1 MCU3.13
D26: MCU3.12 TP43.P$1
D27: MCU3.1 R48.1
D28: MCU3.2 R44.1
D29: MCU3.9 TP40.P$1
D30: MCU3.10 TP41.P$1
D31: MCU3.11 TP42.P$1
D32: JP107.2 MCU3.14
D33: JP136.1 MCU4.13
D34: MCU4.12 TP56.P$1
D35: MCU4.1 R62.1
D36: MCU4.2 R58.1
D37: MCU4.9 TP53.P$1
D38: MCU4.10 TP54.P$1
D39: MCU4.11 TP55.P$1
D40: JP136.2 MCU4.14
D41: MCU.1 R6.1
D42: MCU.2 R1.1
D43: MCU.9 TP1.P$1
D44: MCU.10 TP6.P$1
D45: MCU.11 TP7.P$1
D46: JP27.2 MCU.14
D47: JP165.1 MCU5.13
D48: MCU5.12 TP69.P$1
D49: MCU5.1 R76.1
D50: MCU5.2 R72.1
D51: MCU5.9 TP66.P$1
D52: MCU5.10 TP67.P$1
D53: MCU5.11 TP68.P$1
D54: JP165.2 MCU5.14
DTR1: C16.2 JP33.1
DTR2: C27.2 JP62.1
DTR3: C38.2 JP91.1
DTR4: C49.2 JP120.1
DTR5: C2.2 JP10.1
DTR6: C60.2 JP149.1
GND [vcc]: C1.1 C3.1 C4.2 C5.2 C6.2 C7.2 C8.2 C9.2 C10.2 C11.2 D1.C JP2.1 JP3.1 JP5.1 JP6.1 JP16.1 JP22.GND1 JP22.SHIELD1 JP22.SHIELD2 JP22.SHIELD3 JP25.1 LDO.1 MCU.3 MCU.5 MCU.21 Q1.2 Q2.2 R3.1 R5.1 R7.1 R9.1 TP3.P$1 TP4.TP TP9.P$1 TP12.TP U1.1 U1.9 U1.11 U1.18 U2.2
GND1 [vcc]: C12.2 C13.1 C14.1 C15.2 C17.2 C18.2 C19.2 C20.2 C21.2 C22.2 D3.C JP7.1 JP39.1 JP47.1 JP48.1 JP53.1 JP57.1 JP58.GND1 JP58.SHIELD1 JP58.SHIELD2 JP58.SHIELD3 LDO1.1 MCU1.3 MCU1.5 MCU1.21 Q3.2 Q4.2 R17.1 R19.1 R21.1 R28.1 TP20.P$1 TP21.P$1 TP24.TP TP26.TP U3.2 U4.1 U4.9 U4.11 U4.18
GND2 [vcc]: C23.2 C24.1 C25.1 C26.2 C28.2 C29.2 C30.2 C31.2 C32.2 C33.2 D5.C JP59.1 JP68.1 JP76.1 JP77.1 JP82.1 JP86.1 JP87.GND1 JP87.SHIELD1 JP87.SHIELD2 JP87.SHIELD3 LDO2.1 MCU2.3 MCU2.5 MCU2.21 Q5.2 Q6.2 R31.1 R33.1 R35.1 R42.1 TP33.P$1 TP34.P$1 TP37.TP TP39.TP U5.2 U6.1 U6.9 U6.11 U6.18
GND3 [vcc]: C34.2 C35.1 C36.1 C37.2 C39.2 C40.2 C41.2 C42.2 C43.2 C44.2 D7.C JP88.1 JP97.1 JP105.1 JP106.1 JP111.1 JP115.1 JP116.GND1 JP116.SHIELD1 JP116.SHIELD2 JP116.SHIELD3 LDO3.1 MCU3.3 MCU3.5 MCU3.21 Q7.2 Q8.2 R45.1 R47.1 R49.1 R56.1 TP46.P$1 TP47.P$1 TP50.TP TP52.TP U7.2 U8.1 U8.9 U8.11 U8.18
GND4 [vcc]: C45.2 C46.1 C47.1 C48.2 C50.2 C51.2 C52.2 C53.2 C54.2 C55.2 D9.C JP117.1 JP126.1 JP134.1 JP135.1 JP140.1 JP144.1 JP145.GND1 JP145.SHIELD1 JP145.SHIELD2 JP145.SHIELD3 LDO4.1 MCU4.3 MCU4.5 MCU4.21 Q9.2 Q10.2 R59.1 R61.1 R63.1 R70.1 TP59.P$1 TP60.P$1 TP63.TP TP65.TP U9.2 U10.1 U10.9 U10.11 U10.18
GND5 [vcc]: C56.2 C57.1 C58.1 C59.2 C61.2 C62.2 C63.2 C64.2 C65.2 C66.2 D11.C JP146.1 JP155.1 JP163.1 JP164.1 JP169.1 JP173.1 JP174.GND1 JP174.SHIELD1 JP174.SHIELD2 JP174.SHIELD3 LDO5.1 MCU5.3 MCU5.5 MCU5.21 Q11.2 Q12.2 R73.1 R75.1 R77.1 R84.1 TP72.P$1 TP73.P$1 TP76.TP TP78.TP U11.2 U12.1 U12.9 U12.11 U12.18
LED1: D3.A R18.1 R20.2
LED2: D5.A R32.1 R34.2
LED3: D7.A R46.1 R48.2
LED4: D9.A R60.1 R62.2
LED5: D1.A R4.1 R6.2
LED6: D11.A R74.1 R76.2
MISO1: JP35.1 JP51.1 MCU1.16
MISO2: JP64.1 JP80.1 MCU2.16
MISO3: JP93.1 JP109.1 MCU3.16
MISO4: JP122.1 JP138.1 MCU4.16
MISO5: JP12.1 JP29.1 MCU.16
MISO6: JP151.1 JP167.1 MCU5.16
MOSI1: JP37.1 JP50.2 MCU1.15
MOSI2: JP66.1 JP79.2 MCU2.15
MOSI3: JP95.1 JP108.2 MCU3.15
MOSI4: JP124.1 JP137.2 MCU4.15
MOSI5: JP14.1 JP28.2 MCU.15
MOSI6: JP153.1 JP166.2 MCU5.15
N$2: MCU.8 Q1.1
N$4: MCU.7 Q1.3
N$5: Q2.1 R1.2 R5.2
N$9: MCU1.8 Q3.1
N$11: MCU1.7 Q3.3
N$12: Q4.1 R16.2 R19.2
N$13: C20.1 U4.10
N$14: C21.1 U4.20
N$15: C22.1 U4.8
N$16: JP58.D+1 R25.2
N$17: JP58.D-1 R26.2
N$18: D4.C R28.2
N$19: MCU2.8 Q5.1
N$20: MCU2.7 Q5.3
N$21: Q6.1 R30.2 R33.2
N$22: C31.1 U6.10
N$23: C32.1 U6.20
N$24: C33.1 U6.8
N$25: JP87.D+1 R39.2
N$26: JP87.D-1 R40.2
N$27: D6.C R42.2
N$28: MCU3.8 Q7.1
N$29: MCU3.7 Q7.3
N$30: Q8.1 R44.2 R47.2
N$31: C42.1 U8.10
N$32: C43.1 U8.20
N$33: C44.1 U8.8
N$34: JP116.D+1 R53.2
N$35: JP116.D-1 R54.2
N$36: D8.C R56.2
N$37: MCU4.8 Q9.1
N$38: MCU4.7 Q9.3
N$39: Q10.1 R58.2 R61.2
N$40: C53.1 U10.10
N$41: C54.1 U10.20
N$42: C55.1 U10.8
N$43: JP145.D+1 R67.2
N$44: JP145.D-1 R68.2
N$45: D10.C R70.2
N$46: C8.1 U1.10
N$47: C9.1 U1.20
N$48: C11.1 U1.8
N$49: JP22.D+1 R13.2
N$50: JP22.D-1 R14.2
N$51: D2.C R9.2
N$52: MCU5.8 Q11.1
N$53: MCU5.7 Q11.3
N$54: Q12.1 R72.2 R75.2
N$55: C64.1 U12.10
N$56: C65.1 U12.20
N$57: C66.1 U12.8
N$58: JP174.D+1 R81.2
N$59: JP174.D-1 R82.2
N$60: D12.C R84.2
RESET1: C16.1 JP38.1 MCU1.29 R12.1
RESET2: C27.1 JP67.1 MCU2.29 R29.1
RESET3: C38.1 JP96.1 MCU3.29 R43.1
RESET4: C49.1 JP125.1 MCU4.29 R57.1
RESET5: C2.1 JP15.1 MCU.29 R2.1
RESET6: C60.1 JP154.1 MCU5.29 R71.1
RXI1: JP26.1 MCU1.30
RXI2: JP60.1 MCU2.30
RXI3: JP89.1 MCU3.30
RXI4: JP118.1 MCU4.30
RXI5: JP8.1 MCU.30
RXI6: JP147.1 MCU5.30
SCK1: JP36.1 JP50.1 MCU1.17
SCK2: JP65.1 JP79.1 MCU2.17
SCK3: JP94.1 JP108.1 MCU3.17
SCK4: JP123.1 JP137.1 MCU4.17
SCK5: JP13.1 JP28.1 MCU.17
SCK6: JP152.1 JP166.1 MCU5.17
SOC: R4.2 U2.1
SOC1: R18.2 U3.1
SOC2: R32.2 U5.1
SOC3: R46.2 U7.1
SOC4: R60.2 U9.1
SOC5: R74.2 U11.1
TXO1: JP32.1 MCU1.31
TXO2: JP61.1 MCU2.31
TXO3: JP90.1 MCU3.31
TXO4: JP119.1 MCU4.31
TXO5: JP9.1 MCU.31
TXO6: JP148.1 MCU5.31
VBAT1 [vcc]: C17.1 JP45.1 LDO1.3 R22.2 TP22.TP U3.3
VBAT2 [vcc]: C28.1 JP74.1 LDO2.3 R36.2 TP35.TP U5.3
VBAT3 [vcc]: C39.1 JP103.1 LDO3.3 R50.2 TP48.TP U7.3
VBAT4 [vcc]: C50.1 JP132.1 LDO4.3 R64.2 TP61.TP U9.3
VBAT5 [vcc]: C5.1 JP24.1 LDO.3 R8.2 TP10.TP U2.3
VBAT6 [vcc]: C61.1 JP161.1 LDO5.3 R78.2 TP74.TP U11.3
VIBR1: JP46.1 Q4.3
VIBR2: JP75.1 Q6.3
VIBR3: JP104.1 Q8.3
VIBR4: JP133.1 Q10.3
VIBR5: JP23.1 Q2.3
VIBR6: JP162.1 Q12.3

## Tracks (layer width: path | path; a pad name or v marks a point on that pad's centre or on a via)
3.3V1  (via drill 0.51 pad 1.02, 0.51 pad 1.27)
  Top 0.203: 31.58,23.16 31.62,23.19 MCU1.18 | R23.2 R24.2 17.96,29.09 18.81,28.24 18.81,26.59 19.45,25.96 v19.45,25.7 | U4.13 11.85,21.11 | 24.97,23.99 24.96,24 | 23.03,25.59 MCU1.4 | 23,33.58 JP52.1 | 40.53,31.04 36.21,31.04 34.94,29.77 JP56.1 | 40.91,31.04 40.99,31.04 | 22.5,33.58 21.73,32.82 JP52.1 | 23.51,33.58 22.24,32.31 JP52.1 | JP34.1 15.13,18.08 | 16.15,19.61 14.62,18.08 | 15.64,18.08 16.66,19.1 | 8.02,18.08 JP41.1 | 7.51,18.08 6.5,19.1 JP41.1 | JP41.1 7,19.61 8.53,18.08 | 7.76,25.7 R12.2 7.17,25.7 7,25.7 6.75,25.45 6.75,23.16 6.5,22.91 5.73,22.91 5.22,22.4 5.22,20.62 6.24,19.61 JP41.1
  Top 0.254: 31.65,23.16 31.62,23.19 | 38.24,20.87 38.24,20.88 | 38.24,20.88 40.49,20.88 | 38.24,20.88 38.24,22.91 38.75,23.42 40.53,23.42 | MCU1.6 22.96,23.93 | 16.15,19.61 JP34.1 16.66,19.1 | 40.53,23.42 41.04,23.93 41.04,23.42 40.53,23.42 | 40.53,23.42 41.04,22.91
  Top 0.305: 31.58,23.16 30.88,23.16 30.12,23.92 30.12,24.93 29.36,25.7 28.09,25.7 27.58,25.19 27.58,24.17 27.07,23.66 25.29,23.66 24.97,23.99 24.97,24 | 24.96,24 MCU1.6 21,24 C13.2 20.46,24.69 v19.45,25.7 18.81,25.7 | 23.03,25.59 23.04,25.58 | 16.4,19.61 JP34.1 16.66,21 | 16.66,21 16.66,21.13 16.91,21.39 17.54,21.39 17.8,21.64 17.8,24.66 18.81,25.7 | 16.66,21 11.96,21 11.85,21.11 | v17.04,25.45 18.56,25.45 | 18.56,25.45 18.81,25.7 | 18.56,25.45 18.31,25.2 17.16,25.2 17.04,25.32 v17.04,25.45 | v17.04,25.45 17.8,24.69 17.8,25.07
  Top 0.381: JP48.2 38.24,20.87
  Top 0.406: 40.49,20.88 40.99,21.38 40.99,31.04 40.99,33.38 40.78,33.58 23.51,33.58 23,33.58 22.5,33.58 | v7.13,31.29 7.13,30.78 7.92,30.78 LDO1.2 | 23.04,25.58 19.58,25.58 v19.45,25.7 | 40.91,31.04 40.53,31.04 | C12.1 30.88,18.85 31.51,18.21 35.58,18.21 JP48.2 | 15.64,18.08 15.13,18.08 14.62,18.08 8.53,18.08 8.02,18.08 7.51,18.08
  Top 0.61: C18.1 7.18,30.74 v7.13,31.29 | LDO1.2 7.58,29.85 7.41,29.68
  Top 1.016: v7.13,31.29 v6.11,31.29
  Bottom 0.152: 16.91,25.2 16.91,25.32 v17.04,25.45
  Bottom 0.254: R27.2 7.76,30.78
  Bottom 0.305: JP52.1 21.1,31.67 19.45,31.67 | 19.45,31.67 18.05,30.28 18.05,29.13 16.53,27.74 15.13,27.74 14.88,27.48 | TP25.TP 19.2,31.93 19.45,31.67 | TP19.P$1 14.88,27.23
  Bottom 0.406: v19.45,25.7 18.94,25.2 16.91,25.2 15.38,25.2 14.88,25.7 14.88,27.23 14.88,27.48 11.57,30.78 7.76,30.78 7.64,30.78 v7.13,31.29
  Bottom 1.016: v6.11,31.29 7,31.29
3.3V2  (via drill 0.51 pad 1.02, 0.51 pad 1.27)
  Top 0.203: 55.42,28.34 55.38,28.31 MCU2.18 | R37.2 R38.2 69.04,22.41 68.19,23.26 68.19,24.91 67.55,25.54 v67.55,25.8 | U6.13 75.15,30.39 | 62.03,27.51 62.04,27.5 | 63.97,25.91 MCU2.4 | 63.99,17.92 JP81.1 | 46.47,20.46 50.79,20.46 52.06,21.73 JP85.1 | 46.09,20.46 46.01,20.46 | 64.5,17.92 65.27,18.68 JP81.1 | 63.49,17.92 64.76,19.19 JP81.1 | JP63.1 71.87,33.42 | 70.85,31.89 72.38,33.42 | 71.36,33.42 70.34,32.4 | 78.98,33.42 JP70.1 | 79.49,33.42 80.5,32.4 JP70.1 | JP70.1 80,31.89 78.47,33.42 | 79.23,25.8 R29.2 79.83,25.8 80,25.8 80.25,26.05 80.25,28.34 80.5,28.59 81.27,28.59 81.78,29.1 81.78,30.88 80.76,31.89 JP70.1
  Top 0.254: 55.35,28.34 55.38,28.31 | 48.76,30.63 48.76,30.62 | 48.76,30.62 46.51,30.62 | 48.76,30.62 48.76,28.59 48.25,28.08 46.47,28.08 | MCU2.6 64.04,27.57 | 70.85,31.89 JP63.1 70.34,32.4 | 46.47,28.08 45.96,27.57 45.96,28.08 46.47,28.08 | 46.47,28.08 45.96,28.59
  Top 0.305: 55.42,28.34 56.12,28.34 56.88,27.58 56.88,26.57 57.65,25.8 58.91,25.8 59.42,26.31 59.42,27.33 59.93,27.84 61.71,27.84 62.03,27.51 62.03,27.5 | 62.04,27.5 MCU2.6 66,27.5 C24.2 66.53,26.81 v67.55,25.8 68.19,25.8 | 63.97,25.91 63.96,25.92 | 70.6,31.89 JP63.1 70.34,30.5 | 70.34,30.5 70.34,30.37 70.09,30.11 69.46,30.11 69.2,29.86 69.2,26.84 68.19,25.8 | 70.34,30.5 75.04,30.5 75.15,30.39 | v69.96,26.05 68.44,26.05 | 68.44,26.05 68.19,25.8 | 68.44,26.05 68.69,26.3 69.84,26.3 69.96,26.18 v69.96,26.05 | v69.96,26.05 69.2,26.81 69.2,26.43
  Top 0.381: JP77.2 48.76,30.63
  Top 0.406: 46.51,30.62 46.01,30.12 46.01,20.46 46.01,18.12 46.22,17.92 63.49,17.92 63.99,17.92 64.5,17.92 | v79.87,20.21 79.87,20.72 79.08,20.72 LDO2.2 | 63.96,25.92 67.42,25.92 v67.55,25.8 | 46.09,20.46 46.47,20.46 | C23.1 56.12,32.65 55.49,33.29 51.42,33.29 JP77.2 | 71.36,33.42 71.87,33.42 72.38,33.42 78.47,33.42 78.98,33.42 79.49,33.42
  Top 0.61: C29.1 79.82,20.76 v79.87,20.21 | LDO2.2 79.42,21.65 79.59,21.82
  Top 1.016: v79.87,20.21 v80.89,20.21
  Bottom 0.152: 70.09,26.3 70.09,26.18 v69.96,26.05
  Bottom 0.254: R41.2 79.23,20.72
  Bottom 0.305: JP81.1 65.9,19.83 67.55,19.83 | 67.55,19.83 68.95,21.22 68.95,22.37 70.47,23.76 71.87,23.76 72.12,24.02 | TP38.TP 67.81,19.57 67.55,19.83 | TP32.P$1 72.12,24.27
  Bottom 0.406: v67.55,25.8 68.06,26.3 70.09,26.3 71.61,26.3 72.12,25.8 72.12,24.27 72.12,24.02 75.42,20.72 79.23,20.72 79.36,20.72 v79.87,20.21
  Bottom 1.016: v80.89,20.21 80,20.21
3.3V3  (via drill 0.51 pad 1.02, 0.51 pad 1.27)
  Top 0.203: 55.42,45.84 55.38,45.81 MCU3.18 | R51.2 R52.2 69.04,39.91 68.19,40.76 68.19,42.41 67.55,43.04 v67.55,43.3 | U8.13 75.15,47.89 | 62.03,45.01 62.04,45 | 63.97,43.41 MCU3.4 | 63.99,35.42 JP110.1 | 46.47,37.96 50.79,37.96 52.06,39.23 JP114.1 | 46.09,37.96 46.01,37.96 | 64.5,35.42 65.27,36.18 JP110.1 | 63.49,35.42 64.76,36.69 JP110.1 | JP92.1 71.87,50.92 | 70.85,49.39 72.38,50.92 | 71.36,50.92 70.34,49.9 | 78.98,50.92 JP99.1 | 79.49,50.92 80.5,49.9 JP99.1 | JP99.1 80,49.39 78.47,50.92 | 79.23,43.3 R43.2 79.83,43.3 80,43.3 80.25,43.55 80.25,45.84 80.5,46.09 81.27,46.09 81.78,46.6 81.78,48.38 80.76,49.39 JP99.1
  Top 0.254: 55.35,45.84 55.38,45.81 | 48.76,48.13 48.76,48.12 | 48.76,48.12 46.51,48.12 | 48.76,48.12 48.76,46.09 48.25,45.58 46.47,45.58 | MCU3.6 64.04,45.07 | 70.85,49.39 JP92.1 70.34,49.9 | 46.47,45.58 45.96,45.07 45.96,45.58 46.47,45.58 | 46.47,45.58 45.96,46.09
  Top 0.305: 55.42,45.84 56.12,45.84 56.88,45.08 56.88,44.07 57.65,43.3 58.91,43.3 59.42,43.81 59.42,44.83 59.93,45.34 61.71,45.34 62.03,45.01 62.03,45 | 62.04,45 MCU3.6 66,45 C35.2 66.53,44.31 v67.55,43.3 68.19,43.3 | 63.97,43.41 63.96,43.42 | 70.6,49.39 JP92.1 70.34,47.99 | 70.34,47.99 70.34,47.87 70.09,47.61 69.46,47.61 69.2,47.36 69.2,44.34 68.19,43.3 | 70.34,47.99 75.04,47.99 75.15,47.89 | v69.96,43.55 68.44,43.55 | 68.44,43.55 68.19,43.3 | 68.44,43.55 68.69,43.8 69.84,43.8 69.96,43.68 v69.96,43.55 | v69.96,43.55 69.2,44.31 69.2,43.93
  Top 0.381: JP106.2 48.76,48.13
  Top 0.406: 46.51,48.12 46.01,47.62 46.01,37.96 46.01,35.62 46.22,35.42 63.49,35.42 63.99,35.42 64.5,35.42 | v79.87,37.71 79.87,38.22 79.08,38.22 LDO3.2 | 63.96,43.42 67.42,43.42 v67.55,43.3 | 46.09,37.96 46.47,37.96 | C34.1 56.12,50.15 55.49,50.79 51.42,50.79 JP106.2 | 71.36,50.92 71.87,50.92 72.38,50.92 78.47,50.92 78.98,50.92 79.49,50.92
  Top 0.61: C40.1 79.82,38.26 v79.87,37.71 | LDO3.2 79.42,39.15 79.59,39.32
  Top 1.016: v79.87,37.71 v80.89,37.71
  Bottom 0.152: 70.09,43.8 70.09,43.68 v69.96,43.55
  Bottom 0.254: R55.2 79.23,38.22
  Bottom 0.305: JP110.1 65.9,37.33 67.55,37.33 | 67.55,37.33 68.95,38.72 68.95,39.87 70.47,41.26 71.87,41.26 72.12,41.52 | TP51.TP 67.81,37.07 67.55,37.33 | TP45.P$1 72.12,41.77
  Bottom 0.406: v67.55,43.3 68.06,43.8 70.09,43.8 71.61,43.8 72.12,43.3 72.12,41.77 72.12,41.52 75.42,38.22 79.23,38.22 79.36,38.22 v79.87,37.71
  Bottom 1.016: v80.89,37.71 80,37.71
3.3V4  (via drill 0.51 pad 1.02, 0.51 pad 1.27)
  Top 0.203: 31.58,40.66 31.62,40.69 MCU4.18 | R65.2 R66.2 17.96,46.59 18.81,45.74 18.81,44.09 19.45,43.46 v19.45,43.2 | U10.13 11.85,38.61 | 24.97,41.49 24.96,41.5 | 23.03,43.09 MCU4.4 | 23,51.08 JP139.1 | 40.53,48.54 36.21,48.54 34.94,47.27 JP143.1 | 40.91,48.54 40.99,48.54 | 22.5,51.08 21.73,50.32 JP139.1 | 23.51,51.08 22.24,49.81 JP139.1 | JP121.1 15.13,35.58 | 16.15,37.11 14.62,35.58 | 15.64,35.58 16.66,36.6 | 8.02,35.58 JP128.1 | 7.51,35.58 6.5,36.6 JP128.1 | JP128.1 7,37.11 8.53,35.58 | 7.76,43.2 R57.2 7.17,43.2 7,43.2 6.75,42.95 6.75,40.66 6.5,40.41 5.73,40.41 5.22,39.9 5.22,38.12 6.24,37.11 JP128.1
  Top 0.254: 31.65,40.66 31.62,40.69 | 38.24,38.37 38.24,38.38 | 38.24,38.38 40.49,38.38 | 38.24,38.38 38.24,40.41 38.75,40.92 40.53,40.92 | MCU4.6 22.96,41.43 | 16.15,37.11 JP121.1 16.66,36.6 | 40.53,40.92 41.04,41.43 41.04,40.92 40.53,40.92 | 40.53,40.92 41.04,40.41
  Top 0.305: 31.58,40.66 30.88,40.66 30.12,41.42 30.12,42.43 29.36,43.2 28.09,43.2 27.58,42.69 27.58,41.67 27.07,41.16 25.29,41.16 24.97,41.49 24.97,41.5 | 24.96,41.5 MCU4.6 21,41.5 C46.2 20.46,42.19 v19.45,43.2 18.81,43.2 | 23.03,43.09 23.04,43.08 | 16.4,37.11 JP121.1 16.66,38.51 | 16.66,38.51 16.66,38.63 16.91,38.89 17.54,38.89 17.8,39.14 17.8,42.16 18.81,43.2 | 16.66,38.51 11.96,38.51 11.85,38.61 | v17.04,42.95 18.56,42.95 | 18.56,42.95 18.81,43.2 | 18.56,42.95 18.31,42.7 17.16,42.7 17.04,42.82 v17.04,42.95 | v17.04,42.95 17.8,42.19 17.8,42.57
  Top 0.381: JP135.2 38.24,38.37
  Top 0.406: 40.49,38.38 40.99,38.88 40.99,48.54 40.99,50.88 40.78,51.08 23.51,51.08 23,51.08 22.5,51.08 | v7.13,48.79 7.13,48.28 7.92,48.28 LDO4.2 | 23.04,43.08 19.58,43.08 v19.45,43.2 | 40.91,48.54 40.53,48.54 | C45.1 30.88,36.35 31.51,35.71 35.58,35.71 JP135.2 | 15.64,35.58 15.13,35.58 14.62,35.58 8.53,35.58 8.02,35.58 7.51,35.58
  Top 0.61: C51.1 7.18,48.24 v7.13,48.79 | LDO4.2 7.58,47.35 7.41,47.18
  Top 1.016: v7.13,48.79 v6.11,48.79
  Bottom 0.152: 16.91,42.7 16.91,42.82 v17.04,42.95
  Bottom 0.254: R69.2 7.76,48.28
  Bottom 0.305: JP139.1 21.1,49.17 19.45,49.17 | 19.45,49.17 18.05,47.78 18.05,46.63 16.53,45.24 15.13,45.24 14.88,44.98 | TP64.TP 19.2,49.43 19.45,49.17 | TP58.P$1 14.88,44.73
  Bottom 0.406: v19.45,43.2 18.94,42.7 16.91,42.7 15.38,42.7 14.88,43.2 14.88,44.73 14.88,44.98 11.57,48.28 7.76,48.28 7.64,48.28 v7.13,48.79
  Bottom 1.016: v6.11,48.79 7,48.79
3.3V5  (via drill 0.51 pad 1.02, 0.51 pad 1.27)
  Top 0.203: 31.58,5.66 31.62,5.69 MCU.18 | R10.2 R11.2 17.96,11.59 18.81,10.74 18.81,9.09 19.45,8.46 v19.45,8.2 | U1.13 11.85,3.61 | 24.97,6.49 24.96,6.5 | 23.03,8.09 MCU.4 | 23,16.08 JP1.1 | 40.53,13.54 36.21,13.54 34.94,12.27 JP4.1 | 40.91,13.54 40.99,13.54 | 22.5,16.08 21.73,15.32 JP1.1 | 23.51,16.08 22.24,14.81 JP1.1 | JP11.1 15.13,0.58 | 16.15,2.11 14.62,0.58 | 15.64,0.58 16.66,1.6 | 8.02,0.58 JP18.1 | 7.51,0.58 6.5,1.6 JP18.1 | JP18.1 7,2.11 8.53,0.58 | 7.76,8.2 R2.2 7.17,8.2 7,8.2 6.75,7.95 6.75,5.66 6.5,5.41 5.73,5.41 5.22,4.9 5.22,3.12 6.24,2.11 JP18.1
  Top 0.254: 31.65,5.66 31.62,5.69 | 38.24,3.37 38.24,3.38 | 38.24,3.38 40.49,3.38 | 38.24,3.38 38.24,5.41 38.75,5.92 40.53,5.92 | MCU.6 22.96,6.43 | 16.15,2.11 JP11.1 16.66,1.6 | 40.53,5.92 41.04,6.43 41.04,5.92 40.53,5.92 | 40.53,5.92 41.04,5.41
  Top 0.305: 31.58,5.66 30.88,5.66 30.12,6.42 30.12,7.43 29.36,8.2 28.09,8.2 27.58,7.69 27.58,6.67 27.07,6.16 25.29,6.16 24.97,6.49 24.97,6.5 | 24.96,6.5 MCU.6 21,6.5 C3.2 20.46,7.19 v19.45,8.2 18.81,8.2 | 23.03,8.09 23.04,8.08 | 16.4,2.11 JP11.1 16.66,3.5 | 16.66,3.5 16.66,3.63 16.91,3.89 17.54,3.89 17.8,4.14 17.8,7.16 18.81,8.2 | 16.66,3.5 11.96,3.5 11.85,3.61 | v17.04,7.95 18.56,7.95 | 18.56,7.95 18.81,8.2 | 18.56,7.95 18.31,7.7 17.16,7.7 17.04,7.82 v17.04,7.95 | v17.04,7.95 17.8,7.19 17.8,7.57
  Top 0.381: JP2.2 38.24,3.37
  Top 0.406: 40.49,3.38 40.99,3.88 40.99,13.54 40.99,15.88 40.78,16.08 23.51,16.08 23,16.08 22.5,16.08 | v7.13,13.79 7.13,13.28 7.92,13.28 LDO.2 | 23.04,8.08 19.58,8.08 v19.45,8.2 | 40.91,13.54 40.53,13.54 | C10.1 30.88,1.35 31.51,0.71 35.58,0.71 JP2.2 | 15.64,0.58 15.13,0.58 14.62,0.58 8.53,0.58 8.02,0.58 7.51,0.58
  Top 0.61: C6.1 7.18,13.24 v7.13,13.79 | LDO.2 7.58,12.35 7.41,12.18
  Top 1.016: v7.13,13.79 v6.11,13.79
  Bottom 0.152: 16.91,7.7 16.91,7.82 v17.04,7.95
  Bottom 0.254: R15.2 7.76,13.28
  Bottom 0.305: JP1.1 21.1,14.17 19.45,14.17 | 19.45,14.17 18.05,12.78 18.05,11.63 16.53,10.24 15.13,10.24 14.88,9.98 | TP13.TP 19.2,14.43 19.45,14.17 | TP5.P$1 14.88,9.73
  Bottom 0.406: v19.45,8.2 18.94,7.7 16.91,7.7 15.38,7.7 14.88,8.2 14.88,9.73 14.88,9.98 11.57,13.28 7.76,13.28 7.64,13.28 v7.13,13.79
  Bottom 1.016: v6.11,13.79 7,13.79
3.3V6  (via drill 0.51 pad 1.02, 0.51 pad 1.27)